# EAGLE board EIB_DMCdrive (EAGLE 9.4.0)
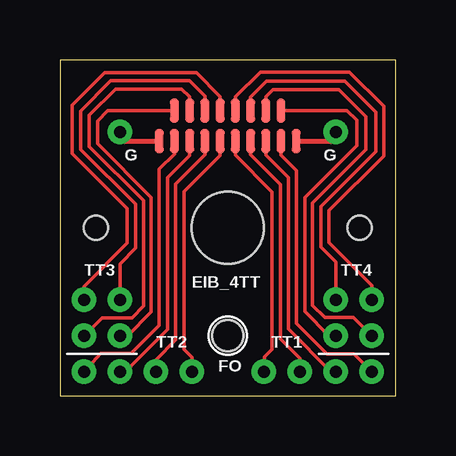
[diagram p0: board, top side]
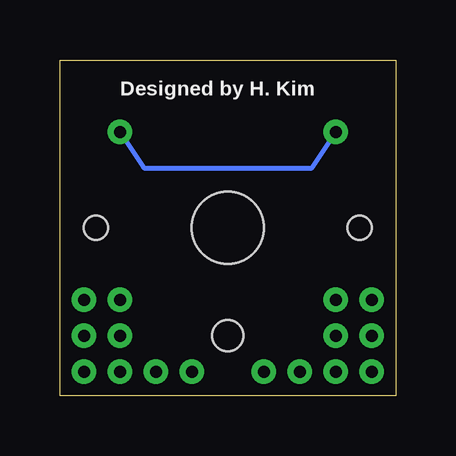
[diagram p1: board, bottom side, seen from below]

Size 14 x 14 mm. Coordinates in mm from the lower left corner, seen from the top.
Outline: 0,0 14,0 14,14 0,14 0,0
Copper layers (1*16): Top 0.035mm / dielectric 0.73mm / Bottom 0.035mm
Design rules "default *": minimum track width 10mil, minimum drill 16mil, track to track 7mil, track to pad 7mil, pad to pad 7mil, via to via 7mil, smd to smd 7mil, copper to edge 7mil, drill to drill 7mil, minimum pad ring 10mil, minimum via ring 8mil, stop-mask expansion 4mil, vias tented up to drill 0mil, thermal gap 10mil
Holes 1 mm at 1.5,7 12.5,7
Holes 3 mm at 7,7
Holes 1.3 mm at 7,2.5

## Footprints (pad centres in the part's own frame; a part is rotated, then mirrored left to right if it is on the bottom)
OMNETICS_FE18 = smd 0.381 x 1.016: P$1 -1.905,0.635; P$2 -1.27,0.635; P$3 -0.635,0.635; P$4 0,0.635; P$5 0.635,0.635; P$6 1.27,0.635; P$7 1.905,0.635; P$8 2.54,0.635; P$9 2.54,-0.635; P$10 1.905,-0.635; P$11 1.27,-0.635; P$12 0.635,-0.635; P$13 0,-0.635; P$14 -0.635,-0.635; P$15 -1.27,-0.635; P$16 -1.905,-0.635; P$17 -2.54,0.635; P$18 3.175,0.635
LARGEGOLDPIN = drill 0.5: P1 0,0

## Placement (x,y rotation side)
U$1  OMNETICS_FE18  [OMNETICS_FE18]  7.32,11.25 180 top
U$2  GOLDPINLARGE  [LARGEGOLDPIN]  2.5,11 0 top
U$3  GOLDPINLARGE  [LARGEGOLDPIN]  11.5,11 0 top
U$4  GOLDPINLARGE  [LARGEGOLDPIN]  1,4 0 top
U$5  GOLDPINLARGE  [LARGEGOLDPIN]  2.5,4 0 top
U$6  GOLDPINLARGE  [LARGEGOLDPIN]  1,2.5 0 top
U$7  GOLDPINLARGE  [LARGEGOLDPIN]  2.5,2.5 0 top
U$8  GOLDPINLARGE  [LARGEGOLDPIN]  5.5,1 0 top
U$9  GOLDPINLARGE  [LARGEGOLDPIN]  1,1 0 top
U$10  GOLDPINLARGE  [LARGEGOLDPIN]  2.5,1 0 top
U$11  GOLDPINLARGE  [LARGEGOLDPIN]  4,1 0 top
U$12  GOLDPINLARGE  [LARGEGOLDPIN]  13,4 0 top
U$13  GOLDPINLARGE  [LARGEGOLDPIN]  11.5,4 0 top
U$14  GOLDPINLARGE  [LARGEGOLDPIN]  13,2.5 0 top
U$15  GOLDPINLARGE  [LARGEGOLDPIN]  11.5,2.5 0 top
U$16  GOLDPINLARGE  [LARGEGOLDPIN]  8.5,1 0 top
U$17  GOLDPINLARGE  [LARGEGOLDPIN]  13,1 0 top
U$18  GOLDPINLARGE  [LARGEGOLDPIN]  11.5,1 0 top
U$19  GOLDPINLARGE  [LARGEGOLDPIN]  10,1 0 top

## Library data of the parts
U$1-U$19 = josh

## Nets
S$1: U$1.P$12 U$4.P1
S$2: U$1.P$11 U$5.P1
S$3: U$1.P$10 U$6.P1
S$4: U$1.P$9 U$7.P1
S$6: U$1.P$8 U$9.P1
S$7: U$1.P$7 U$10.P1
S$8: U$1.P$6 U$11.P1
S$10: U$1.P$5 U$8.P1
S$11: U$1.P$13 U$12.P1
S$12: U$1.P$14 U$13.P1
S$14: U$1.P$15 U$14.P1
S$15: U$1.P$16 U$15.P1
S$16: U$1.P$1 U$17.P1
S$17: U$1.P$2 U$18.P1
S$18: U$1.P$3 U$19.P1
S$19: U$1.P$4 U$16.P1
S$20: U$1.P$17 U$1.P$18 U$2.P1 U$3.P1

## Tracks (layer width: path | path; a pad name or v marks a point on that pad's centre or on a via)
S$1
  Top 0.15: U$1.P$12 6.68,12.47 5.7,13.46 1.87,13.46 0.52,12.11 0.52,10.1 2.81,7.81 2.81,6.36 1,4.55 U$4.P1
S$2
  Top 0.15: U$5.P1 2.5,5.5 3.15,6.15 3.15,7.98 0.86,10.27 0.86,11.87 2.12,13.13 5.4,13.13 6.04,12.48 U$1.P$11
S$3
  Top 0.15: U$6.P1 1.75,3.25 3,3.25 3.48,3.73 3.48,8.13 1.22,10.39 1.22,11.69 2.32,12.79 5.08,12.79 5.41,12.46 U$1.P$10
S$4
  Top 0.15: U$7.P1 2.83,2.5 3.81,3.48 3.81,8.27 1.56,10.52 1.56,11.45 2,11.88 U$1.P$9
S$6
  Top 0.15: U$9.P1 1.71,1.76 2.97,1.76 4.14,2.93 4.14,9.44 4.78,10.07 U$1.P$8
S$7
  Top 0.15: U$1.P$7 5.41,10.01 4.49,9.09 4.49,2.77 2.72,1 U$10.P1
S$8
  Top 0.15: U$11.P1 4,1.5 4.82,2.32 4.82,8.82 6.04,10.04 U$1.P$6
S$10
  Top 0.15: U$8.P1 5.5,1.6 5.17,1.93 5.17,8.51 6.68,10.02 U$1.P$5
S$11
  Top 0.15: U$1.P$13 7.32,12.46 8.36,13.5 12.08,13.5 13.5,12.08 13.5,10 11.21,7.71 11.21,6.39 13,4.6 U$12.P1
S$12
  Top 0.15: U$1.P$14 7.95,12.45 8.62,13.12 11.88,13.12 13.17,11.83 13.17,10.17 10.88,7.88 10.88,6.19 11.5,5.57 U$13.P1
S$14
  Top 0.15: U$1.P$15 8.59,12.46 8.88,12.77 11.63,12.77 12.77,11.63 12.77,10.27 10.54,8.04 10.54,3.76 11.05,3.25 12.25,3.25 U$14.P1
S$15
  Top 0.15: U$15.P1 11.22,2.5 10.21,3.51 10.21,8.26 12.38,10.43 12.38,11.48 11.97,11.88 U$1.P$16
S$16
  Top 0.15: U$1.P$1 9.22,10.04 9.87,9.39 9.87,3.01 11.13,1.75 12.25,1.75 U$17.P1
S$17
  Top 0.15: U$18.P1 11.31,1 9.53,2.78 9.53,9.09 8.59,10.04 U$1.P$2
S$18
  Top 0.15: U$1.P$3 7.95,10.05 9.19,8.81 9.19,2.36 10,1.55 U$19.P1
S$19
  Top 0.102: U$16.P1 8.53,1.03
  Top 0.15: U$1.P$4 7.32,10.03 8.84,8.5 8.84,1.93 8.53,1.62 8.53,1.03
S$20
  Top 0.2: U$2.P1 2.62,10.62 U$1.P$18 | U$1.P$17 11.38,10.62 U$3.P1
  Bottom 0.2: U$3.P1 10.5,9.5 3.5,9.5 U$2.P1

## Text on the board
tNames: G | G | TT3 | TT4 | EIB_4TT | TT2 | TT1 | FO
bNames: Designed by H. Kim